# Altium PCB ups.PcbDoc
Units mil, origin at the board's own origin, x right, y up, seen from the top; angles counter-clockwise.
Board outline 5362.2 x 3236.22 mil, 2 copper layers (Top Layer, Bottom Layer); 104 components, 58 nets, 252 pads, 0 vias.
Unrouted connection lines stored in the file: 130.
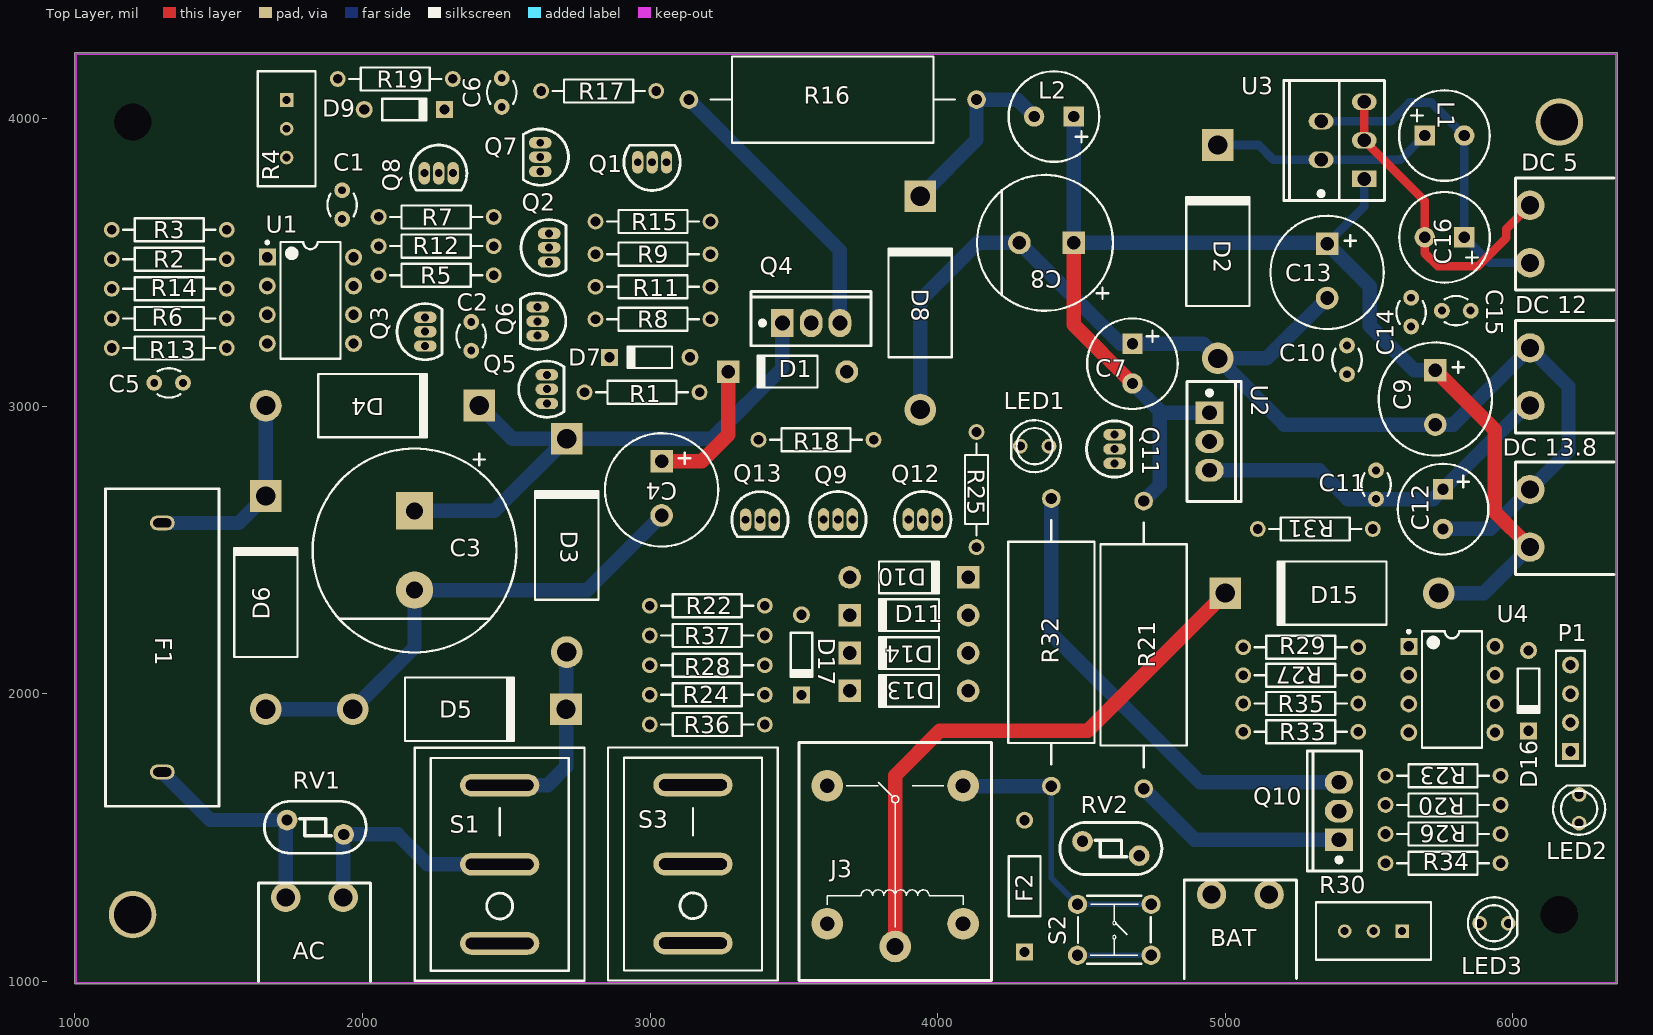
[diagram p0: Top Layer view]
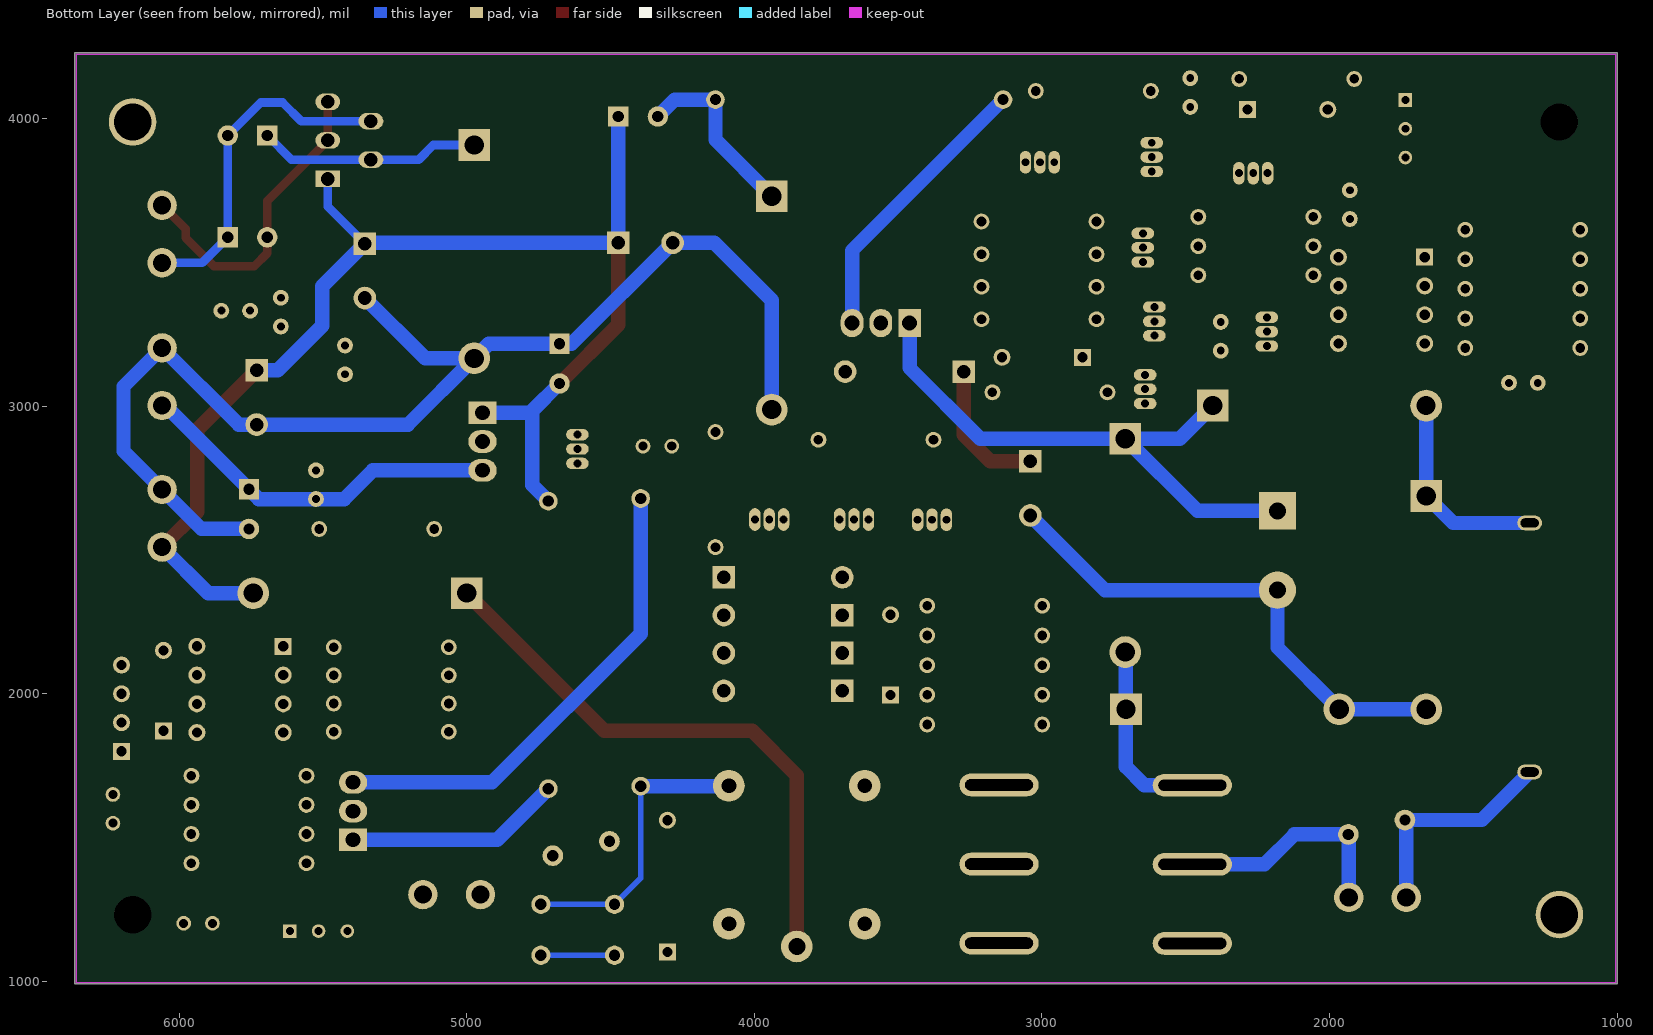
[diagram p1: Bottom Layer view, seen from below]

## Layer stack, top to bottom
Top Solder: solder mask 0.4, Solder Resist, Dk 3.5
Top Layer: signal copper 1.4
Dielectric 1: dielectric 12.6, FR-4, Dk 4.8
Bottom Layer: signal copper 1.4
Bottom Solder: solder mask 0.4, Solder Resist, Dk 3.5

## Board outline
1000,992.13 6362.2,992.13 6362.2,4228.35 1000,4228.35

## Design rules (kind name [scope] priority, off if disabled: settings)
Clearance [All] p1: gap=10
MinimumSolderMaskSliver [All] p1: minsoldermaskwidth=8
PolygonConnect [All] p1: connectstyle=Relief reliefconductorwidth=10 reliefentries=4 polygonreliefangle="90 Angle" airgapwidth=10
RoutingVias [All] p1: holewidth=50 width=100 viastyle="Through Hole" minholewidth=12 minwidth=18 maxholewidth=20 maxwidth=30
SolderMaskExpansion [All] p1: expansion=4
UnpouredPolygon [All] p1: allowunpoured=FALSE
Width [All] p1: maxlimit=100 minlimit=10 preferedwidth=15
28 further rules are at their usual default settings.

## Components (designator, comment, footprint, x,y, rotation, side; value= is the part's Value field where it differs from the comment)
AC "CON2" CON-2-5.08 1833,1292 r180 top
BAT "CON2" CON-2-5.08 5052,1302 r180 top
C1 "0.1uF" C-RAD 1929.13,3700.79 r90 top
C2 "33nF" C-RAD 2378,3243 r270 top
C3 "1000uF/35V" C-RB-18 2181,2636 r270 top
C4 "470uF" C-RB-10 3040,2809 r270 top
C5 "33nF" C-RAD 1326,3081 r180 top
C6 "1nF" C-RAD 2484.25,4090.55 r270 top
C7 "100uF" C-RB-8 4677.17,3216.54 r270 top
C8 "1000uF/25V" C-RB-12 4473,3568 r180 top
C9 "1000uF，25V" C-RB-10 5730,3125 r270 top
C10 "0.1uF" C-RAD 5423,3161 r90 top
C11 "0.1uF" C-RAD 5524,2727 r270 top
C12 "470uF，16V" C-RB-8 5757,2711 r270 top
C13 "1000uF，25V" C-RB-10 5354,3565 r270 top
C14 "0.1uF" C-RAD 5646,3327 r90 top
C15 "0.1uF" C-RAD 5803,3332 r0 top
C16 "470uF，16V" C-RB-8 5831,3587 r180 top
D1 "IN4007" DO-41 3478,3120 r180 top
D2 "SR3100,3A" DO-201AD 4974,3537 r90 top
D3 "IN5404" DO-201AD 2710,2516 r90 top
D4 "IN5404" DO-201AD 2035,3002 r0 top
D5 "IN5404" DO-201AD 2337,1946 r0 top
D6 "IN5404" DO-201AD 1664,2317 r90 top
D7 "Diode-Z" DIODE-AXL 2999,3170 r180 top
D8 "SR3100" DO-201AD 3939,3359 r90 top
D9 "Diode-Z" DIODE-AXL 2145.67,4031.5 r0 top
D10 "IN4007" DO-41 3900,2405 r0 top
D11 "IN4007" DO-41 3900,2273.33 r180 top
D13 "IN4007" DO-41 3900,2010 r180 top
D14 "IN4007" DO-41 3900,2141.67 r180 top
D15 "SR3100,3A" DO-201AD 5371,2350 r180 top
D16 "Diode-Z" DIODE-AXL 6054,2011 r270 top
D17 "Diode-Z" DIODE-AXL 3526,2135 r270 top
"DC 5" "CON2" CON-2-5.08 6059.06,3598.43 r270 top
"DC 12" "CON2" CON-2-5.08 6059.06,3102.36 r270 top
"DC 13.8" "CON2" CON-2-5.08 6059.06,2610.24 r270 top
F1 "5A/30V" BLX-A 1304,2161 r90 top
F2 "5A/30V" PIN-W2/E2.8 4302,1331 r90 top
J3 "HFKC" HF3FF-12 3852,1397 r90 top
L1 "33uH" C-RB-8 5692.91,3940.94 r0 top
L2 "200uH" C-RB-8 4473,4007 r180 top
LED1 "Error" LED_A2 4337,2861 r0 top
LED2 "Error" LED_A2 6230,1600 r270 top
LED3 "Error" LED_A2 5934,1202 r180 top
P1 "Header 4" HDR1X4 6200,1800 r90 top
Q1 "SS8550" TO-92-3 3007,3848 r180 top
Q2 "SS8050" TO-92-3 2649,3551 r90 top
Q3 "S8550" TO-92-3 2218,3259 r90 top
Q4 "MOSFET-N" TO-220-3 3560,3289 r0 top
Q5 "SS8050" TO-92-3 2641,3059 r90 top
Q6 "SS8550" TO-92-3 2609,3295 r270 top
Q7 "SS8050" TO-92-3 2618,3866 r270 top
Q8 "SS8050" TO-92-3 2265,3810 r0 top
Q9 "SS8550" TO-92-3 3653,2606 r0 top
Q10 "TIP42" TO-220-3 5395,1592 r90 top
Q11 "SS8050" TO-92-3 4615,2851 r90 top
Q12 "SS8050" TO-92-3 3948,2606 r0 top
Q13 "SS8550" TO-92-3 3382,2605 r0 top
R1 "20KΩ" AXIAL-0.4 2972,3048 r180 top
R2 "10KΩ" AXIAL-0.4 1328.06,3510.62 r0 top
R3 "10KΩ" AXIAL-0.4 1328.06,3613.37 r0 top
R4 "RPot" VR_A1 1736.22,3964.57 r270 top
R5 "20KΩ" AXIAL-0.4 2256,3455 r180 top
R6 "10KΩ" AXIAL-0.4 1328.06,3305.12 r0 top
R7 "10KΩ" AXIAL-0.4 2256,3658 r180 top
R8 "10KΩ" AXIAL-0.4 3010,3302 r180 top
R9 "10KΩ" AXIAL-0.4 3010,3528.67 r180 top
R11 "10Ω" AXIAL-0.4 3010,3415.33 r0 top
R12 "10KΩ" AXIAL-0.4 2256,3556.5 r0 top
R13 "10KΩ" AXIAL-0.4 1328.06,3202.37 r180 top
R14 "10KΩ" AXIAL-0.4 1328.06,3407.87 r180 top
R15 "20KΩ" AXIAL-0.4 3010,3642 r180 top
R16 "2Ω/5w" AXIAL-1.0 3635,4066 r0 top
R17 "1KΩ" AXIAL-0.4 2821,4096 r0 top
R18 "10KΩ" AXIAL-0.4 3577,2883 r0 top
R19 "10KΩ" AXIAL-0.4 2114.17,4137.8 r180 top
R20 "10KΩ" AXIAL-0.4 5757,1613.67 r0 top
R21 "1Ω,10W" AXIAL-1.0 4716,2170 r270 top
R22 "1KΩ" AXIAL-0.4 3199,2306 r180 top
R23 "10KΩ" AXIAL-0.4 5757,1715 r0 top
R24 "100Ω" AXIAL-0.4 3199,1996.25 r0 top
R25 "10KΩ" AXIAL-0.4 4135,2710 r90 top
R26 "100KΩ" AXIAL-0.4 5757,1512.33 r0 top
R27 "10Ω" AXIAL-0.4 5262,2064 r180 top
R28 "4.7KΩ" AXIAL-0.4 3199,2099.5 r0 top
R29 "10KΩ" AXIAL-0.4 5262,2162 r180 top
R30 "RPot" VR_A1 5515,1175 r180 top
R31 "100KΩ" AXIAL-0.4 5313,2573 r180 top
R32 "1Ω,10W" AXIAL-1.0 4395,2179 r270 top
R33 "100KΩ" AXIAL-0.4 5262,1868 r180 top
R34 "100KΩ" AXIAL-0.4 5757,1411 r180 top
R35 "100KΩ" AXIAL-0.4 5262,1966 r180 top
R36 "4.7KΩ" AXIAL-0.4 3199,1893 r180 top
R37 "680Ω" AXIAL-0.4 3199,2202.75 r180 top
RV1 "07D330K,Ф7mm" AX-5P-9DX4.6T 1836,1536 r0 top
RV2 "07D330K,Ф7mm" AX-5P-9DX4.6T 4602,1462 r0 top
S1 "SW-SPDT" SWITCH_A3 2477,1407 r90 top
S2 "SW-SPST" SW_4 4486,1268 r0 top
S3 "SW-SPDT" SWITCH_A3 3149,1408 r90 top
U1 "LM393" DIP-8 1819,3368 r0 top
U2 "LM7812" TO-220-3 4945,2877 r270 top
U3 "LM2596S-5.0" TO-220-5A 5333,3924 r90 top
U4 "LM393" DIP-8 5788,2015 r0 top

## Footprints (in the part's own frame and the unit in brackets; to place one, negate y for a bottom-side part, rotate by r counter-clockwise, add the part's x,y. Pads: shape width x height; smd on the part's side, far side on the other; paste and mask are expansions set on the pad)
AX-5P-9DX4.6T [mil]
  round 72 hole 39.37: 1(-98.43,25) 2(98.43,-25)
  silkscreen extent -177,-91 177,91
AXIAL-0.4 [mm] "Axial Device, Thru-Hole; 2 Leads; 0.4 in Pin Spacing"
  round 1.4 hole 0.85: 1(-5.08,0) 2(5.08,0)
  silkscreen extent -4.06,-1.02 4.06,1.02
AXIAL-1.0 [mm] "Axial Device, Thru-Hole; 2 Leads; 1.0 in Pin Spacing"
  round 1.65 hole 1: 1(-12.7,0) 2(12.7,0)
  silkscreen extent -10.79,-3.81 10.79,3.81
BLX-A [mm] "保险丝夹"
  oval 1.3x2.2 hole 0.8 slot 1.6 at 90 deg: 1(-10.998,0) 2(10.998,0)
  silkscreen extent -14.02,-5 14.02,5
C-RAD [mm] "瓷片电容"
  round 1.4 hole 0.7: 1(-1.27,0) 2(1.27,0)
  silkscreen extent -1.02,-1.3 0.98,1.3
C-RB-8 [mm] "35V 220UF电容"
  rect 1.8x1.8 hole 1: 1(0,0)
  round 1.8 hole 1: 2(3.5,0)
  silkscreen extent -2.25,-4 5.75,4
C-RB-10 [mm] "35V470uF电容"
  rect 2x2 hole 1.2: 1(0,0)
  round 2 hole 1.2: 2(4.8,0)
  silkscreen extent -2.46,-5 7.54,5
C-RB-12 [mm] "35V470uF电容"
  rect 2x2 hole 1.2: 1(0,0)
  round 2 hole 1.2: 2(4.8,0)
  silkscreen extent -3.46,-6 8.54,6
C-RB-18 [mm] "35V2200uF电容"
  rect 3.3x3.3 hole 1.5: 1(0,0)
  round 3.3 hole 1.5: 2(7,0)
  silkscreen extent -5.5,-9 12.5,9
CON-2-5.08 [mm]
  round 2.6 hole 1.6: 1(-2.54,0) 2(2.54,0)
  silkscreen extent -4.95,-1.27 4.95,7.42
DIODE-AXL [mm] "直插二极管"
  round 1.5 hole 0.9: 1(-3.55,0)
  rect 1.5x1.5 hole 0.9: 2(3.55,0)
  silkscreen extent -1.95,-0.95 2.05,0.95
DIP-8 [mm] "DIP; 8 Leads; Row Spacing 7.62 mm; Pitch 2.54 mm"
  rect 1.5x1.5 hole 0.9: 1(-3.81,3.81)
  round 1.5 hole 0.9: 2(-3.81,1.27) 3(-3.81,-1.27) 4(-3.81,-3.81) 5(3.81,-3.81) 6(3.81,-1.27) 7(3.81,1.27) 8(3.81,3.81)
  silkscreen extent -3.93,-5.15 2.65,5.23, body extent -3.6,-5.15 3.6,5.15, height 5.08
DO-41 [mm] "Diode, Axial; Body 5.2 x 2.7 mm (LxDia. max), Lead Dia. 0.86 mm (max)"
  round 2 hole 1.2: 1(-5.23,0)
  rect 2x2 hole 1.2: 2(5.23,0)
  silkscreen extent -2.65,-1.4 2.75,1.4
DO-201AD [mm] "Diode, Axial; Body 9.5 x 5.6 mm (LxDia. max), Lead Dia. 1.32 mm (max)"
  round 2.8 hole 1.7: 1(-9.42,0)
  rect 2.8x2.8 hole 1.7: 2(9.42,0)
  silkscreen extent -4.8,-2.8 4.9,2.8
HDR1X4 [mm] "Connector; Header; 4 Position"
  rect 1.5x1.5 hole 0.9: 1(0,0)
  round 1.5 hole 0.9: 2(2.54,0) 3(5.08,0) 4(7.62,0)
  silkscreen extent -1.27,-1.27 8.89,1.27
HF3FF-12 [mm] "宏发继电器12VDC"
  round 2.8 hole 1.3: 1(-5,-6) 2(-5,6) 3(7.2,6) 5(7.2,-6)
  round 2.8 hole 1.5: 4(-7,0)
  silkscreen extent -10,-8.5 11,8.5
LED_A2 [mm] "直径3MM二极管"
  round 1.3 hole 0.8: 1(1.27,0) 2(-1.27,0)
  silkscreen extent -2.06,-2.3 2.3,2.3
PIN-W2/E2.8 [mm] "Thru-Hole; 2 Leads"
  rect 1.5x1.5 hole 0.9: 1(-5.825,0)
  round 1.5 hole 0.9: 2(5.825,0)
  silkscreen extent -2.65,-1.4 2.65,1.4
SW_4 [mm]
  round 1.7 hole 1: 1(0,0) 1(6.5,0) 2(0,-4.5) 2(6.5,-4.5)
  silkscreen extent 0.05,-5.25 6.48,0.75
SWITCH_A3 [mm] "单刀单掷开关"
  oval 2x7 hole 1 slot 6 at 90 deg: 1(-6.985,0) 2(0,0) 3(6.985,0)
  silkscreen extent -10.29,-7.49 10.29,7.49
TO-92-3 [mm]
  oval 1x2 hole 0.7 mask+0.051: 1(-1.27,0) 2(0,0) 3(1.27,0)
  silkscreen extent -2.48,-1.5 2.48,2.48, body extent -2.61,-1.6 2.61,2.6, height 8
TO-220-3 [mm] "三极管,MOS管"
  rect 2x2.5 hole 1.3: 1(-2.54,0)
  oval 2x2.5 hole 1.3: 2(0,0) 3(2.54,0)
  silkscreen extent -5.3,-2 5.3,2.8, body extent -5.08,-1.45 5.08,2.9, height 19.6
TO-220-5A [mm]
  rect 1.45x2.2 hole 1.2 mask+0.051: 1(-3.404,-3.81)
  oval 1.45x2.2 hole 1.2 mask+0.051: 2(-1.7,0) 3(0,-3.81) 4(1.7,0) 5(3.404,-3.81)
  silkscreen extent -5.3,-5.59 5.3,3.3
VR_A1 [mm] "Potentiometer; 3 Leads"
  rect 1.2x1.2 hole 0.7: 1(-2.54,0)
  round 1.2 hole 0.7: 2(0,0) 3(2.54,0)
  silkscreen extent -5.08,-2.54 5.08,2.54, body extent -5.08,-2.54 5.08,2.54, height 10.5

## Part data
AC BAT "DC 5" "DC 12" "DC 13.8": "2EDGR/2EDGK-5.08-2P,DEGSON"
C1 C2 C5 C6 C7 C10 C11 C14 C15: library part Cap, "电容"
C3 C4 C8 C9 C12 C13 C16: library part "Cap Pol3", "大容量电容"
D1 D3 D4 D5 D6 D8 D10 D11 D13 D14 D15: library part DIODE, "二极管"
D2: library part DIODE
D7 D9 D16 D17: "稳压二极管"
F1 F2: library part "Fuse 1", "Fuse"
J3: "单刀双掷继电器"
L1 L2: library part INDUCTOR
LED1 LED2 LED3: "红色,0603,0603,*,RoHS"
P1: "Header, 4-Pin"
Q1 Q6 Q9 Q13: "PNP贴片三极管"
Q2 Q5 Q7 Q8 Q11 Q12: "NPN贴片三极管"
Q3: "PNP三极管"
Q4: "N-Channel MOSFET"
Q10: library part MOSFET-N, "N-Channel MOSFET"
R1 R2 R3 R5 R6 R7 R8 R9 R11 R12 R13 R14 R15 R16 R17 R18 R19 R20 R21 R22 R23 R24 R25 R26 R27 R28 R29 R31 R32 R33 R34 R35 R36 R37: library part Res2, "电阻"
R4 R30: "精密可调电阻"
RV1 RV2: "220KD07,Ф8×3mm,RoHS"
S1 S3: "开关"
S2: "Single-Pole, Single-Throw Switch"
U1 U4: "比较器，2"
U2: library part LM7818CT, "Series 3-Terminal Positive Regulator"
U3: "Simple Switcher Power Converter 150 kHz 3A Step Down Voltage Regulator"

## Free pads (board coordinates)
  round 165.35 hole 129.92: 0(1200.79,1232.28) 0(6161.42,3988.19)
  round 125.98 hole 129.92: 0(1200.79,3988.19) 0(6161.42,1232.28)

## Nets (pads, with @x,y where several pads share a name; then routed paths per layer and width w, separated by ;. In a path a pad name is that pad's centre, name@x,y a point inside that pad or via, vN(x,y) a via of type N, cw(c..) or ccw(c..) an arc to the next point about the centre after c; other vN are vias at no path point)
5V: "DC 5.2" C15.2 C16.1 L1.2 U3.4 | length 1191.1
  Bottom Layer w30: U3.4 5574.93,3990.93 5640,4056 5715.65,4056 L1.2 5830.71,3587.29 C16.1 5919.57,3498.43 6059.06,3498.43
12V: "DC 12.2" C11.2 C12.1 R26.2 R29.2 U2.3 U4.8 | length 1279.6
  Bottom Layer w50: U2.3 5326,2777 5426,2677 C11.2 5723,2677 C12.1 6048.36,3002.36
13.8V: "DC 13.8.2" C7.2 C8.1 C9.1 C10.2 C13.1 C14.2 D1.1 D10.1 D13.1 D15.1 L2.1 R18.1 R21.1 R23.1 R25.1 U2.1 U3.1 | length 4595.5
  Top Layer w50: C8.1 4473,3282.91 C7.2 ; C9.1 5937,2918 5937,2632.29 6059.06,2510.24
  Bottom Layer w30: C13.1 5357,3568 5483,3694 U3.1
  Bottom Layer w50: L2.1 C8.1 C13.1@5357,3568 ; C7.2 4772,2983.91 ; R21.1 4772,2726 4772,2983.91 ; U2.1 4778.91,2977 4772,2983.91 ; C13.1 5502,3417 5502,3280 5657,3125 C9.1 ; D15.1 5898.82,2350 6059.06,2510.24
GND: "DC 5.1" "DC 12.1" "DC 13.8.1" BAT.1 C7.1 C8.2 C9.2 C10.1 C11.1 C12.2 C13.2 C14.1 C15.1 C16.2 D2.1 D8.1 D16.1 LED1.2 LED3.2 P1.4 Q11.2 Q13.3 R18.2 R34.1 R35.1 R37.2 RV2.2 U2.2 U3.3 U3.5 U4.4 | length 5487.3
  Top Layer w30: U3.5 U3.3 5693.2,3713.8 C16.2 5693.2,3531.8 5738,3487 5879,3487 5977,3585 5977,3616.37 6059.06,3698.43
  Bottom Layer w50: D8.1 3939,3368 4139,3568 C8.2 4635.49,3216.54 C7.1 4923.6,3216.54 D2.1 ; C13.2 5144.11,3166.13 D2.1 ; C12.2 5922.02,2573.2 6059.06,2710.24 6193,2844.18 6193,3068.42 6059.06,3202.36 5792.72,2936.02 C9.2 5204.11,2936.02 D2.1
NetAC_1: AC.1 RV1.2 S1.2 | length 803.2
  Bottom Layer w50: AC.1 RV1.2@1933,1509.57 ; RV1.2 2122,1511 2226,1407 S1.2
NetAC_2: AC.2 F1.1 RV1.1 | length 767.2
  Bottom Layer w50: F1.1 1471,1561 RV1.1 ; AC.2 RV1.1@1733,1556.43
NetBAT_2: BAT.2 F2.2 RV2.1
NetC1_1: C1.1 C2.1 C3.2 C4.2 C5.1 C6.2 D5.1 D6.1 D7.1 Q5.2 Q6.3 Q7.2 Q8.2 R12.1 R13.1 R15.2 U1.4 | length 1771.9
  Bottom Layer w50: D6.1 D5.1@1966,1946.13 ; D5.1 2181,2160.87 C3.2 2780.39,2360.41 C4.2
NetC1_2: C1.2 Q1.3 Q2.3 R2.2 R3.2 R4.2 R4.3 R5.2 R7.2 R8.1 U1.8
NetC2_2: C2.2 Q3.3
NetC3_1: C3.1 D3.2 D4.2 Q4.1 R1.2 | length 1992.7
  Bottom Layer w50: C3.1 2459.13,2636 D3.2 ; D4.2 2521,2886.87 D3.2 ; Q4.1 3460,3133 3213.87,2886.87 D3.2
NetC4_1: C4.1 D1.2 D9.2 Q1.2 R1.1 | length 489.1
  Top Layer w50: C4.1 3180,2809 3272.09,2901.09 D1.2
NetC5_2: C5.2 R14.1 U1.2 U1.6
NetC6_1: C6.1 Q7.1 R17.1
NetD2_2: D2.2 L1.1 U3.2 | length 774.7
  Bottom Layer w30: D2.2 5116.13,3907.87 5166.93,3857.07 U3.2 5609.04,3857.07 L1.1
NetD3_1: D3.1 D5.2 S1.3 | length 654.5
  Bottom Layer w50: S1.3 2644,1682 2707.87,1745.87 D5.2 D3.1@2707.87,2143
NetD4_1: D4.1 D6.2 F1.2 | length 712.9
  Bottom Layer w50: F1.2 1570.13,2594 D6.2 D4.1@1664,3001.87
NetD7_2: D7.2 Q5.3 R9.2
NetD8_2: D8.2 L2.2 R16.2 | length 642
  Bottom Layer w50: D8.2 4135,3925.87 R16.2 4276.2,4066 L2.2
NetD9_1: D9.1 R19.2
NetD10_2: D10.2 D11.1
NetD11_2: D11.2 Q10.2 R27.1
NetD13_2: D13.2 D17.2
NetD14_1: D14.1 J3.1 Q12.3
NetD14_2: D14.2 J3.2 Q9.3
NetD16_2: D16.2 LED2.2
NetD17_1: D17.1 Q13.1 R37.1
NetF2_1: F2.1 S3.2
NetJ3_5: J3.5 Q9.2 R20.1 R22.1 R32.2 R33.2 S2.1 S3.3 | length 1009.9
  Bottom Layer w20: R32.2 4395,1359 4486,1268 S2.1@4741.91,1268
  Bottom Layer w50: J3.5@4089.69,1679 R32.2
NetLED1_1: LED1.1 R25.2
NetLED2_1: LED2.1 R22.2 R24.1
NetQ1_1: Q1.1 R9.1
NetQ2_1: Q2.1 Q6.1 Q7.3 R7.1 U1.7
NetQ2_2: Q2.2 Q6.2 R11.1
NetQ3_1: Q3.1 R5.1 U1.5
NetQ3_2: Q3.2 Q8.3 R4.1 R12.2
NetQ4_2: Q4.2 R11.2 R15.1
NetQ4_3: Q4.3 R16.1 R17.2 | length 994.5
  Bottom Layer w50: R16.1 3660,3541 Q4.3
NetQ5_1: Q5.1 R8.2
NetQ8_1: Q8.1 R19.1
NetQ9_1: Q9.1 R24.2
NetQ10_1: Q10.1 R21.2 | length 752.7
  Bottom Layer w50: R21.2 4894,1492 Q10.1
NetQ10_3: Q10.3 R32.1 | length 1684.1
  Bottom Layer w50: R32.1 4395,2209 4912,1692 Q10.3
NetQ11_1: Q11.1 R31.2
NetQ11_3: Q11.3 R27.2
NetQ12_1: Q12.1 R28.1
NetQ12_2: Q12.2 Q13.2
NetR2_1: R2.1 R6.2 R13.2 U1.3
NetR3_1: R3.1 R6.1 R14.2 U1.1
NetR26_1: R26.1 R30.3
NetR28_2: R28.2 R36.1 S2.2 | length 255.9
  Bottom Layer w20: S2.2@4486,1090.83 S2.2@4741.91,1090.83
NetR29_1: R29.1 R31.1 U4.1
NetR30_1: R30.1 R34.2
NetR30_2: R30.2 U4.3
NetR33_1: R33.1 R35.2 U4.2
S_BUCK: P1.2 R20.2
S_MAIN: P1.1 R23.2
VOUT: D15.2 J3.4 LED3.1 R36.2 | length 2005.3
  Top Layer w50: J3.4 3852,1716 4007,1871 4521.13,1871 D15.2
pads on no net: J3.3 P1.3 S1.1 S3.1 U4.5 U4.6 U4.7

## Keep-outs
Keep-Out Layer:
  lines w5: 1003.94,996.06 1003.94,4224.41 6358.27,4224.41 6358.27,996.06 1003.94,996.06